# EAGLE board MOD-WiFi-ESP8266_Rev_A (EAGLE 7.1.0)
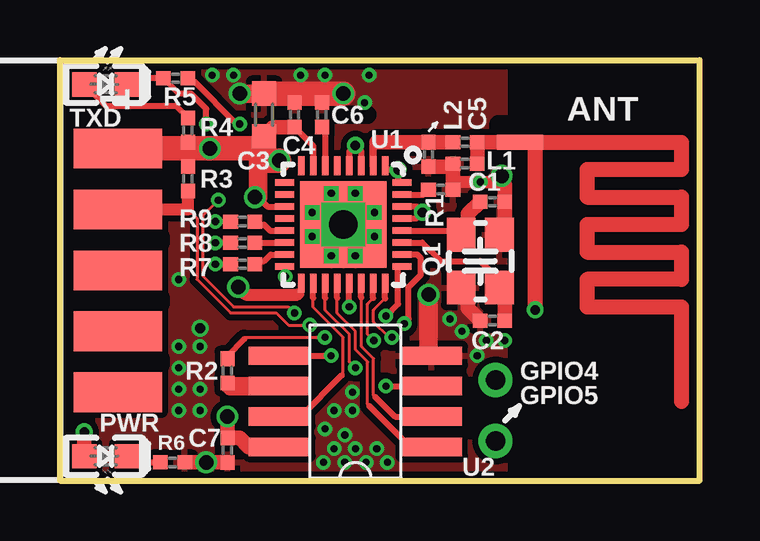
[diagram p0: board, top side]
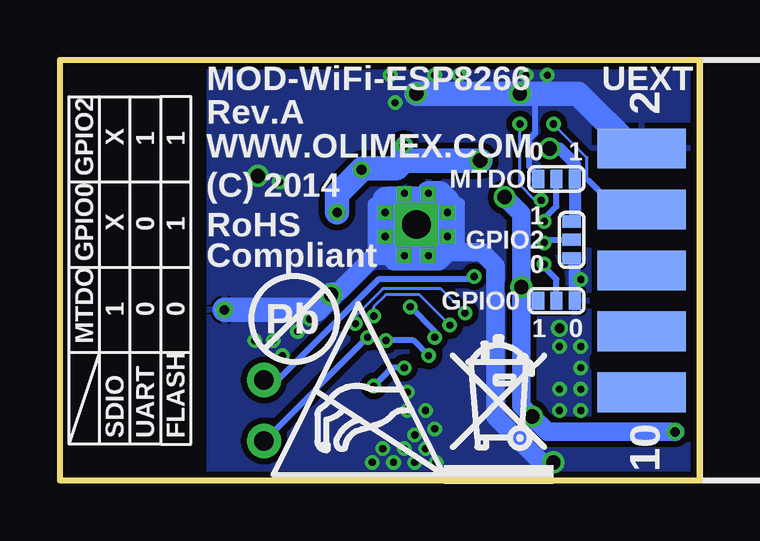
[diagram p1: board, bottom side, seen from below]

Size 26.67 x 17.53 mm. Coordinates in mm from the lower left corner, seen from the top.
Outline: 26.67,0 26.67,17.53 0,17.53 0,0 26.67,0
Copper layers (1+16): Top 0.035mm / dielectric 1.5mm / Bottom 0.035mm
Design rules "default": minimum track width 5mil, minimum drill 0.3mm, track to track 5mil, track to pad 5mil, pad to pad 5mil, via to via 5mil, smd to smd 1mil, copper to edge 5mil, drill to drill 8mil, minimum pad ring 6mil, minimum via ring 6mil, stop-mask expansion 2mil, vias tented up to drill 25mil, thermal gap 10mil
tRestrict: 6 lines
bRestrict: 7 lines

## Footprints (pad centres in the part's own frame; a part is rotated, then mirrored left to right if it is on the bottom)
ESP8266_ANT = smd 0.635 x 1.905: ANT -5.334,-3.302 | drill 0.4 pad 0.635: GND 1.651,-2.667
C0402_TI = smd 0.61 x 0.584: 1 -0.508,0; 2 0.508,0
C0603_DWS = smd 1.016 x 1.016: 1 -0.889,0; 2 0.889,0
SJ_2_SMALLER = smd 0.508 x 0.762: 1 -0.762,0; 2 0,0; 3 0.762,0
TESTPAD32/56 = drill 0.813 pad 1.422: P$1 0,0
L0402_TI = smd 0.61 x 0.584: 1 -0.508,0; 2 0.508,0
LED-0603 = smd 1.016 x 1.016: A 0.889,0; C -0.889,0
NX3225SA = smd 1.4 x 1.2: 1 -1.1,-0.8; 2 1.1,0.8; NC_1 1.1,-0.8; NC_2 -1.1,0.8
R0402_TI = smd 0.61 x 0.584: 1 -0.508,0; 2 0.508,0
LED-0603_L = smd 1.016 x 1.016: A 0.889,0; C -0.889,0
QFN32_PAD = smd 0.8 x 0.28: 1 -2.45,1.75; 2 -2.45,1.25; 3 -2.45,0.75; 4 -2.45,0.25; 5 -2.45,-0.25; 6 -2.45,-0.75; 7 -2.45,-1.25; 8 -2.45,-1.75; 17 2.45,-1.75; 18 2.45,-1.25; 19 2.45,-0.75; 20 2.45,-0.25; 21 2.45,0.25; 22 2.45,0.75; 23 2.45,1.25; 24 2.45,1.75 | smd 0.28 x 0.8: 9 -1.75,-2.45; 10 -1.25,-2.45; 11 -0.75,-2.45; 12 -0.25,-2.45; 13 0.25,-2.45; 14 0.75,-2.45; 15 1.25,-2.45; 16 1.75,-2.45; 25 1.75,2.45; 26 1.25,2.45; 27 0.75,2.45; 28 0.25,2.45; 29 -0.25,2.45; 30 -0.75,2.45; 31 -1.25,2.45; 32 -1.75,2.45 | drill 1.2 pad 1.422 square: P$1 0,0 | drill 0.3 pad 0.4 square: P$2 0.5,1.3; P$3 -0.5,1.3; P$4 -1.3,0.5; P$5 -1.3,-0.5; P$6 -0.5,-1.3; P$7 0.5,-1.3; P$8 1.3,-0.5; P$9 1.3,0.5 | smd 3.6 x 3.6: PAD 0,0
SO8_ATMEL_FLASH = smd 0.762 x 2.54: 1 -1.905,-3.175; 2 -0.635,-3.175; 3 0.635,-3.175; 4 1.905,-3.175; 5 1.905,3.175; 6 0.635,3.175; 7 -0.635,3.175; 8 -1.905,3.175
ML10L_PADS_FEMAIL = smd 1.651 x 3.683 bottom: 1 -5.08,-3.429; 3 -2.54,-3.429; 5 0,-3.429; 7 2.54,-3.429; 9 5.08,-3.429 | smd 1.651 x 3.683: 2 -5.08,-3.429; 4 -2.54,-3.429; 6 0,-3.429; 8 2.54,-3.429; 10 5.08,-3.429

## Placement (x,y rotation side)
ANT  WIFI_ANT_ESP8266  [ESP8266_ANT]  22.48,8.76 270 top
C1  10pF  [C0402_TI]  18.03,11.62 180 top
C2  10pF  [C0402_TI]  18.03,6.67 0 top
C3  10uF  [C0603_DWS]  8.51,15.24 90 top
C4  100nF  [C0402_TI]  9.78,15.24 90 top
C5  5.6pF  [C0402_TI]  16.89,14.1 180 top
C6  NA  [C0402_TI]  10.92,15.24 90 top
C7  100nF  [C0402_TI]  6.99,1.27 270 top
GPIO0  Default:Open  [SJ_2_SMALLER]  5.97,7.49 0 bottom
GPIO2  Default:Open  [SJ_2_SMALLER]  5.33,10.03 270 bottom
GPIO4  TESTPAD32/56  [TESTPAD32/56]  18.16,4.19 0 top
GPIO5  TESTPAD32/56  [TESTPAD32/56]  18.16,1.65 0 top
L1  NA  [L0402_TI]  16.89,13.21 0 top
L2  NA  [L0402_TI]  15.37,13.59 90 top
MTDO  Default:Open  [SJ_2_SMALLER]  5.97,12.57 180 bottom
PWR  LED/Red/0603  [LED-0603]  1.91,1.02 180 top
Q1  TSX-3225/26MHz/10PPM/7pF/3.2x2.5mm SMD  [NX3225SA]  17.53,9.14 270 top
R1  12k  [R0402_TI]  15.88,12.13 0 top
R2  200R  [R0402_TI]  6.99,4.57 90 top
R3  100k  [R0402_TI]  5.33,12.57 90 top
R4  2k  [R0402_TI]  5.33,14.61 270 top
R5  200R  [R0402_TI]  4.83,16.76 180 top
R6  2k  [R0402_TI]  4.7,0.76 180 top
R7  200R  [R0402_TI]  7.62,9.02 0 top
R8  200R  [R0402_TI]  7.62,9.91 0 top
R9  200R  [R0402_TI]  7.62,10.79 0 top
TXD  LED/Green/0603  [LED-0603_L]  1.91,16.51 180 top
U1  ESP8266  [QFN32_PAD]  11.81,10.67 270 top
U2  W25Q16BVSSIG  [SO8_ATMEL_FLASH]  12.32,3.3 90 top
U$4  [ESD_SYMBOL]  17.78,0.25 0 bottom
U$6  [PB_SMALL]  16.89,6.73 180 bottom
U$7  [RECYCLE_BIN1/8]  10.67,-0.13 0 bottom
UEXT  IDC10S/PCB  [ML10L_PADS_FEMAIL]  -1.02,8.76 270 bottom

## Library data of the parts
ANT = OLIMEX_ANT
C1-C7 L1 L2 R1-R9 = rcl
GPIO0 GPIO2 MTDO = jumper
GPIO4 GPIO5 = gogo
PWR TXD = DOUBLE-SIDE
Q1 = OLIMEX_DISCRET
U1 U2 = OLIMEX_IC
U$4 U$6 U$7 = olimex_logo1
UEXT = con-harting-ml

## Nets
GND: ANT.GND C1.1 C2.1 C3.2 C4.2 C6.2 C7.2 GPIO0.3 GPIO2.3 L1.1 L2.1 MTDO.3 Q1.NC_1 Q1.NC_2 R1.2 R6.1 U1.P$1 U1.P$2 U1.P$3 U1.P$4 U1.P$5 U1.P$6 U1.P$7 U1.P$8 U1.P$9 U1.PAD U2.4 UEXT.2
GPIO0: GPIO0.2 R7.1
GPIO2: GPIO2.2 R8.1
GPIO4: GPIO4.P$1 U1.16
GPIO5: GPIO5.P$1 U1.24
MTDO: MTDO.2 R9.1
N$1: R5.2 TXD.C UEXT.4
N$2: R4.1 TXD.A
N$3: PWR.C R6.2
N$4: R7.2 U1.15
N$5: R8.2 U1.14
N$6: R9.2 U1.13
N$12: C5.2 L2.2 U1.2
N$14: ANT.ANT C5.1 L1.2
N$18: C6.1 U1.6
N$21: C2.2 Q1.2 U1.27
N$22: R1.1 U1.31
N$23: C1.2 Q1.1 U1.28
N$27: R2.2 U1.21
RXD: R3.1 U1.25 UEXT.3
SD_CLK: R2.1 U2.6
SD_CMD: U1.20 U2.1
SD_D0: U1.22 U2.2
SD_D1: U1.23 U2.5
SD_D2: U1.18 U2.7
SD_D3: U1.19 U2.3
TXD: R5.1 U1.26
VCC: C3.1 C4.1 C7.1 GPIO0.1 GPIO2.1 MTDO.1 PWR.A R3.2 R4.2 U1.1 U1.3 U1.4 U1.7 U1.11 U1.17 U1.29 U1.30 U1.32 U2.8 UEXT.1

## Tracks (layer width: path | path; a pad name or v marks a point on that pad's centre or on a via)
GND  (via drill 0.3, 0.4, 0.6)
  Top 0.254: 17.02,8.04 Q1.NC_1
  Top 0.508: 16.38,12.45 18.41,12.45 v18.41,12.7
  Top 0.61: 16.38,13.08 L2.1 | R1.2 16.38,12.45 16.38,13.08 | 16.38,13.08 L1.1 | Q1.NC_2 18.54,10.46 C1.1 18.54,12.32 18.41,12.45 | C2.1 17.02,7.18 17.02,8.04 | R6.1 v6.1,0.76 C7.2 | 9.78,16.13 C4.2 | 10.92,16.13 C6.2
  Top 0.762: v15.37,7.75 15.37,5.21 U2.4 | v7.49,16.13 C3.2
  Top 1.016: C3.2 9.78,16.13 10.92,16.13 v11.81,16.13
  Bottom 0.254: MTDO.3 6.73,12.7 7.11,13.08 7.11,14.22 6.86,14.48 6.86,16.13
  Bottom 0.508: 13.11,11.72 12.95,11.87 | U1.P$5 11.31,11.87 | 12.31,11.87 U1.P$4 | 10.03,11.56 10.03,9.78 10.79,9.02 12.83,9.02 13.59,9.78 13.59,11.56 13.11,11.56 | GPIO0.3 5.21,9.27 GPIO2.3
  Bottom 0.762: v6.1,0.76 6.6,0.76 8.51,2.67 8.51,8.95 9.08,9.53 10.67,9.53 | 12.95,11.87 12.31,11.87 11.31,11.87 | 12.8,9.37 13.56,9.37 15.05,7.87 15.24,7.87 v15.37,7.75
  Bottom 1.016: UEXT.2 2.79,13.84 5.08,16.13 6.86,16.13 v7.49,16.13 v11.81,16.13 | 13.11,11.72 13.11,11.56 U1.P$3 U1.P$2 13.11,9.68 12.8,9.37 U1.P$9 U1.P$8 10.82,9.37 10.67,9.53 10.51,9.68 U1.P$7 10.51,10.67 | U1.P$5 10.82,11.97 10.51,11.65 U1.P$6 10.51,10.67 | 10.51,10.67 U1.P$1 | v15.37,7.75 16,7.11 ANT.GND
  other vias: 5.84,6.35 5.84,5.59 4.95,5.59 4.95,4.7 4.95,3.81 5.84,3.81 4.95,2.92 11.43,2.92 11.05,2.16 11.87,0.76 10.99,0.76 13.65,0.76 13.21,1.33 12.76,0.76 12.32,1.33 11.43,1.33 11.87,1.91 12.19,2.92 12.19,3.68 16.26,6.73 16.76,6.22 12.7,15.75 17.53,12.45 4.95,8.38 5.84,2.92 12.89,16.89 17.4,5.21 18.54,5.84 17.78,5.84 10.03,16.89 11.05,16.89 7.24,16.89 6.35,16.89
  pour Top (isolate 0.254): -2.54,-2.54 -2.54,20.07 29.21,20.07 29.21,-2.54
  pour Bottom (isolate 0.254): -5.08,-5.08 -5.08,22.61 31.88,22.61 31.88,-5.08
GPIO0  (via drill 0.3)
  Top 0.254: v6.48,9.02 R7.1
  Bottom 0.254: v6.48,9.02 6.48,8.89 5.97,8.38 GPIO0.2
GPIO2  (via drill 0.3)
  Top 0.254: R8.1 v6.48,9.91
  Bottom 0.254: v6.48,9.91 6.35,10.03 GPIO2.2
GPIO4  (via drill 0.3)
  Top 0.254: U1.16 9.4,8.92 v9.4,8.51
  Bottom 0.254: v9.4,8.51 9.53,8.38 13.4,8.38 17.59,4.19 GPIO4.P$1
GPIO5  (via drill 0.3)
  Top 0.127: 13.56,7.59 13.08,7.11 13.08,6.6 13.72,5.97 v13.84,5.97
  Top 0.254: 13.56,7.59 U1.24
  Bottom 0.254: GPIO5.P$1 v13.84,5.97
MTDO  (via drill 0.3)
  Top 0.254: R9.1 v6.48,10.79
  Bottom 0.254: v6.48,10.79 6.48,10.92 5.97,11.43 MTDO.2
N$1  (via drill 0.3)
  Top 0.254: TXD.C 3.05,16.76 R5.2 4.95,16.13 5.46,16.13 6.1,15.49 v6.1,14.86
  Bottom 0.127: UEXT.4 3.43,11.3 | 4.64,12.51 4.7,12.57 4.7,13.46 v6.1,14.86
  Bottom 0.254: 3.43,11.3 4.64,12.51
N$2
  Top 0.254: TXD.A 1.91,15.62 4.83,15.62 R4.1
N$3
  Top 0.254: PWR.C 3.05,0.76 R6.2
N$4
  Top 0.254: R7.2 8.26,9.14 8.51,9.14 8.78,9.42 U1.15
N$5
  Top 0.254: R8.2 U1.14
N$6
  Top 0.254: R9.2 8.26,10.67 8.51,10.67 8.76,10.42 U1.13
N$12
  Top 0.305: U1.2 13.06,13.95 13.21,14.1
  Top 0.61: C5.2 L2.2 13.21,14.1
N$14
  Top 0.61: L1.2 C5.1 ANT.ANT
N$18
  Top 0.254: C6.1 11.06,14.59 U1.6
N$21
  Top 0.254: U1.27 15.1,9.92 15.88,9.14 17.53,9.14 18.33,8.34 Q1.2
  Top 0.61: C2.2 18.54,7.83 Q1.2
N$22
  Top 0.254: U1.31 15.16,11.92 R1.1
N$23
  Top 0.254: 17.02,10.24 Q1.1 | U1.28 17.02,10.42
  Top 0.61: 17.02,10.24 17.02,10.42 17.02,11.11 C1.2
N$27  (via drill 0.3)
  Top 0.127: v12.06,7.24 | R2.2 6.99,5.21 | 7.68,5.91 7.75,5.97 v11.05,5.97
  Top 0.254: v12.06,7.24 U1.21 | 6.99,5.21 7.68,5.91
  Bottom 0.254: v11.05,5.97 11.05,6.22 v12.06,7.24
RXD  (via drill 0.3)
  Top 0.127: 5.33,11.3 5.71,10.92 5.71,8.38 7.11,6.99 9.02,6.99 9.53,6.48 v10.41,6.48
  Top 0.254: v13.59,6.86 14.1,7.37 14.1,8.38 14.1,8.92 U1.25
  Top 0.508: UEXT.3 5.33,11.3 R3.1
  Bottom 0.127: v10.41,6.48 11.68,7.75 13.08,7.75 13.59,7.24 v13.59,6.86
SD_CLK
  Top 0.61: R2.1 7.11,3.94
  Top 0.762: 7.11,3.94 U2.6
SD_CMD
  Top 0.127: 12.89,3.11 12.83,3.17 12.83,4.95 12.32,5.46 12.32,6.22 11.56,6.98 11.56,7.62
  Top 0.254: 11.56,7.62 U1.20 | U2.1 14.61,1.4 12.89,3.11
SD_D0
  Top 0.127: 12.56,7.63 12.57,7.62 12.57,5.59 13.08,5.08 13.08,3.56 13.14,3.49
  Top 0.254: 12.56,7.63 U1.22 | 13.14,3.49 13.97,2.67 U2.2
SD_D1  (via drill 0.3)
  Top 0.127: v13.08,5.84 12.83,6.1 12.83,7.37 13.06,7.6
  Top 0.254: 13.06,7.6 U1.23 | U2.5 v11.3,5.21
  Bottom 0.254: v11.3,5.21 11.94,5.84 v13.08,5.84
SD_D2
  Top 0.127: 11.75,4.38 11.81,4.45 11.81,5.97 10.56,7.22 10.56,7.6 | U2.7 10.03,2.67
  Top 0.254: 10.56,7.6 U1.18 | 10.03,2.67 11.75,4.38
SD_D3  (via drill 0.3)
  Top 0.127: v12.32,4.7 12.06,4.95 12.06,6.1 11.06,7.1 11.06,7.61
  Top 0.254: 11.06,7.61 U1.19 | v13.59,3.94 U2.3
  Bottom 0.254: v12.32,4.7 12.83,4.7 v13.59,3.94
TXD  (via drill 0.3)
  Top 0.127: v6.6,11.68 5.97,11.05 5.97,8.51 7.24,7.24 9.53,7.24 v9.78,6.99
  Top 0.254: U1.26 14.9,9.42 15.05,9.27 15.05,8.57 14.54,8.06 14.54,6.73 v14.35,6.54 | v7.49,14.86 7.37,14.86 5.59,16.64 5.21,16.64 R5.1
  Bottom 0.127: v6.6,11.68 6.86,11.68 7.49,12.32 v7.49,14.86 | v14.35,6.54 14.35,6.86 13.21,8 10.79,8 v9.78,6.99
VCC  (via drill 0.4, 0.6)
  Top 0.254: C4.1 10.56,13.95 U1.7 | U1.4 12.06,13.71 v12.32,13.97 12.56,13.73 U1.3 | U1.1 13.56,12.95 v14.1,12.95 14.1,12.42 U1.32 | U1.30 14.87,11.42 v15.11,11.18 14.86,10.92 U1.29 | 9.91,7.75 10.06,7.75 U1.17 | 8.26,11.81 8.65,11.42 U1.11
  Top 0.508: v7.43,8.06 7.75,7.75 9.91,7.75
  Top 0.61: PWR.A v1.02,2.03 | v6.99,2.67 C7.1 7.49,1.78 7.87,1.4 U2.8 | C3.1 8.89,14.73 C4.1 | R4.2 5.33,13.84 R3.2
  Top 0.762: v8.13,11.81 8.26,11.81 8.26,13.34 v9.14,13.34
  Top 1.016: 8.51,13.84 C3.1 | v9.14,13.34 8.51,13.34 8.51,13.84 | 8.51,13.84 v6.25,13.84 5.33,13.84 UEXT.1
  Bottom 0.508: 6.86,7.49 GPIO0.1 | GPIO2.1 5.21,10.79 MTDO.1 5.21,13.21 5.84,13.84 v6.25,13.84
  Bottom 0.762: v1.02,2.03 6.35,2.03 v6.99,2.67 7.43,3.11 7.43,7.49 | 7.43,7.49 6.86,7.49 | 7.43,7.49 v7.43,8.06 7.43,11.11 v8.13,11.81 | 12.32,13.34 v12.32,13.97
  Bottom 1.016: v9.14,13.34 12.32,13.34 12.64,13.02 14.03,13.02 v14.1,12.95 15.11,11.94 v15.11,11.18

## Text on the board
bPlace: 1 | 1 | X | GPIO2 | 1 | 0 | X | GPIO0 | 0 | 0 | 1 | MTDO | FLASH | UART | SDIO
bNames: MOD-WiFi-ESP8266 | Rev.A | 1 | 0 | WWW.OLIMEX.COM | (C) 2014 | 1 | RoHS | 0 | Compliant | 0 | 1 | 10
201bmp: C:/YASSEN_ON_C-YASSEN-REBORN/TASKS/MOD-nRF8001===P/Nordic_NRF8001/nRF8001-Gerber Files/with DCDC/\!PICLIST-0909+++.BMP